# Altium PCB OK6410AV2.PcbDoc (part 3 of 4)
Units mm, origin at the board's own origin, x right, y up, seen from the top; angles counter-clockwise.
Board outline 144.31 x 105.28 mm, 4 copper layers (Top, GND, VCC, Bottom), stack 0.899 mm thick; 254 components, 278 nets, 1261 pads, 740 vias.
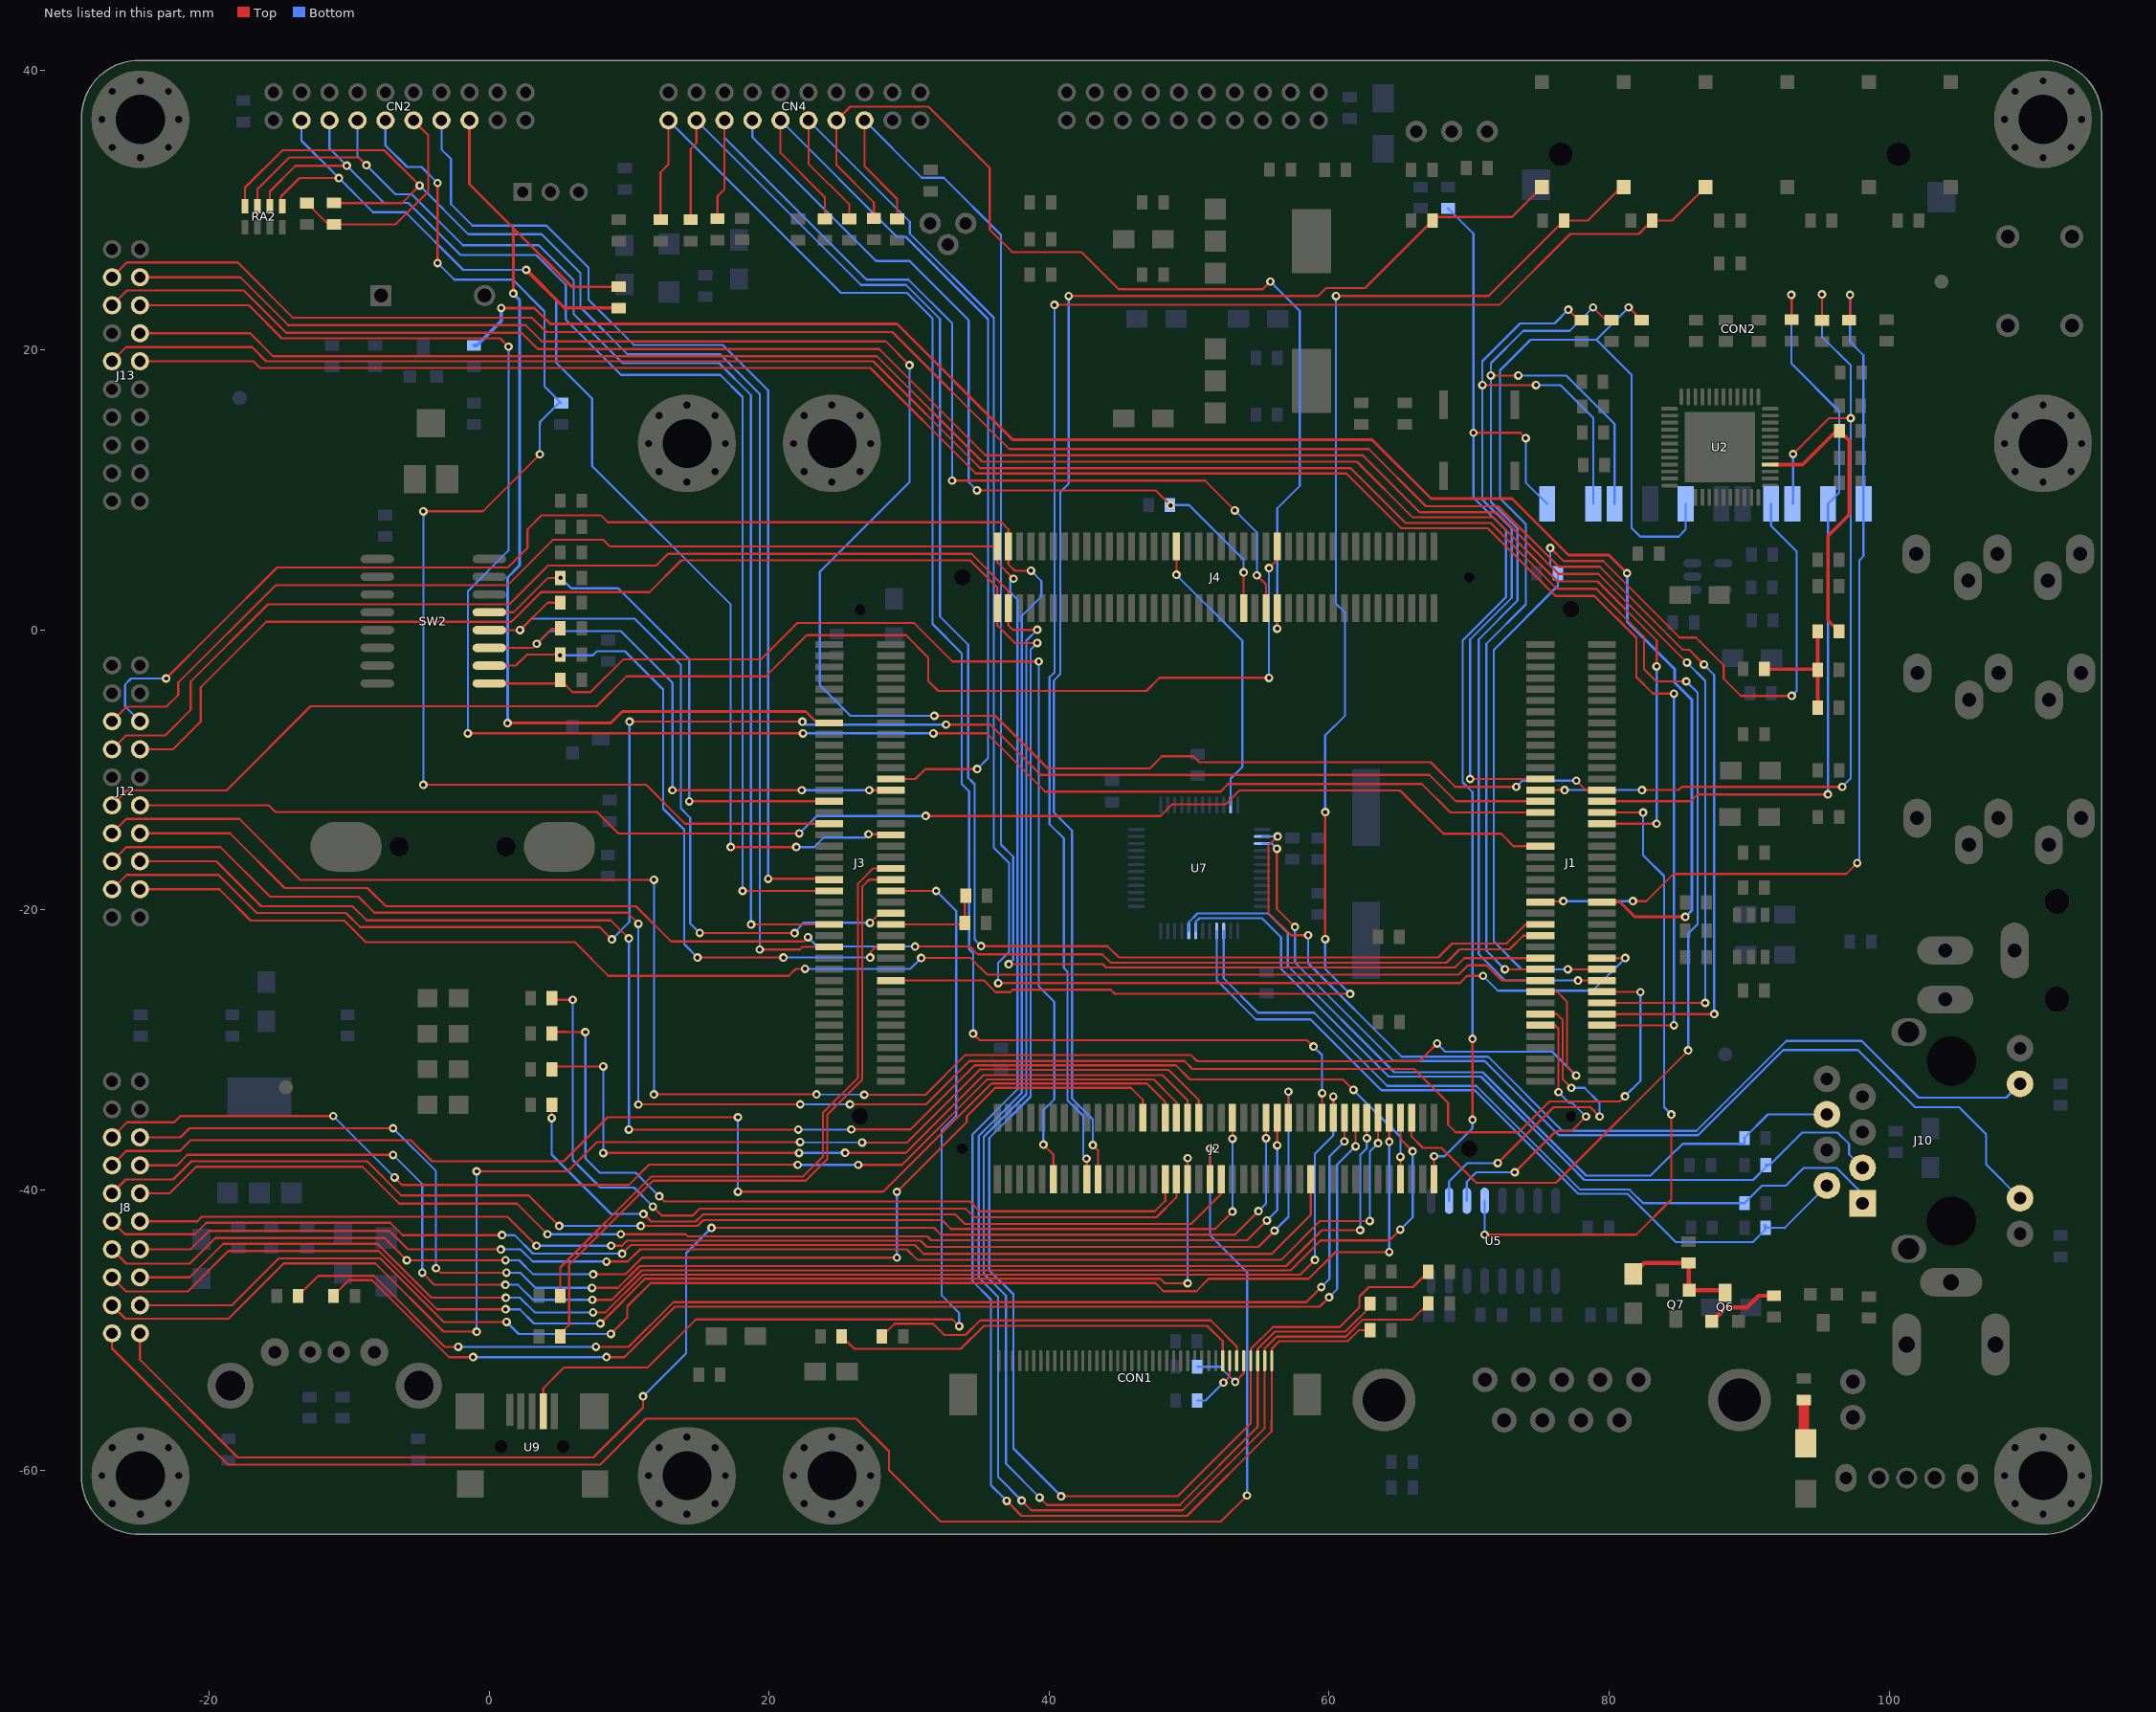
[diagram p5: the nets of this part, all layers, seen from the top]

## Via types
v1: diameter 0.61, hole 0.305, Top to Bottom, tented both sides, 719 vias
v2: diameter 1.27, hole 0.635, Top to Bottom, tented both sides, 21 vias

## Nets (pads, with @x,y where several pads share a name; then routed paths per layer and width w, separated by ;. In a path a pad name is that pad's centre, name@x,y a point inside that pad or via, vN(x,y) a via of type N, cw(c..) or ccw(c..) an arc to the next point about the centre after c; other vN are vias at no path point) (continued)
KEYINT4: J2.63 R74.2 S5.1 | length 113.7
  Top w0.152: v1(40.377,23.23) 72.157,23.23 77.229,28.302 82.122,28.302 R74.2@83.079,29.259 84.485,29.259 S5.1@86.875,31.649 ; v1(42.669,-37.756) 42.689,-37.772 J2.63@42.689,-39.231
  Bottom w0.152: v1(40.377,23.23) 40.377,-3.025 40.024,-3.378 40.024,-13.857 41.043,-14.876 41.043,-24.129 41.311,-24.397 41.311,-33.584 42.427,-34.7 42.427,-37.515 v1(42.669,-37.756)
KEYINT5: J3.20 R59.2 S6.1 | length 108.6
  Top w0.152: J3.20@28.689,-25.031 35.342,-25.031 36.168,-25.857 37.228,-25.857 37.392,-25.693 44.391,-25.693 44.687,-25.989 v1(61.493,-25.989) ; v1(59.715,-22.073) v1(59.715,-13.005) ; v1(60.484,23.864) 71.379,23.864 R59.2@76.775,29.259 78.483,29.259 80.872,31.649 S6.1@81.033,31.649
  Bottom w0.152: v1(59.715,-22.073) 59.715,-24.211 v1(61.493,-25.989) ; v1(59.715,-13.005) 59.715,-7.518 61.137,-6.097 61.137,1.246 60.484,1.899 v1(60.484,23.864)
KEYINT6: J2.61 R58.2 S7.1 | length 101.9
  Top w0.152: v1(41.388,23.864) 59.207,23.864 59.365,24.022 59.783,24.44 62.564,24.44 R58.2@67.382,29.258 67.637,29.514 73.055,29.514 S7.1@75.191,31.649 ; v1(43.116,-36.796) 43.489,-37.17 J2.61@43.489,-39.231
  Bottom w0.152: v1(41.388,23.864) 41.388,10.458 40.794,9.864 40.794,-3.142 40.329,-3.606 40.329,-13.027 41.632,-14.33 41.632,-33.474 43.116,-34.957 v1(43.116,-36.796)
KP_COL0: J2.41 J8.2 | length 119.6
  Top w0.152: J8.2@-26.95,-50.235 -26.95,-51.238 -26.95,-51.314 -18.641,-59.623 7.913,-59.623 11.199,-56.337 26.223,-56.337 28.549,-58.663 28.549,-60.014 32.222,-63.687 52.268,-63.687 v1(54.136,-61.82) ; v1(51.488,-37.041) 51.489,-37.043 J2.41@51.489,-39.231
  Bottom w0.152: v1(51.488,-37.041) 51.488,-43.223 54.136,-45.871 v1(54.136,-61.82)
KP_COL1: J2.44 J8.4 | length 98.3
  Top w0.152: J8.4@-26.95,-48.235 -25.989,-49.196 -18.639,-49.196 -14.686,-45.243 -8.135,-45.243 -3.26,-50.117 v1(-0.904,-50.117) ; v1(-0.905,-38.663) 5.6,-38.663 7.691,-36.572 v1(22.205,-36.572) ; v1(26.627,-36.605) 29.831,-36.605 35.045,-31.39 38.558,-31.39 38.578,-31.41 48.535,-31.41 50.689,-33.564 J2.44@50.689,-34.831
  Bottom w0.152: v1(-0.904,-50.117) -0.904,-41.495 ; -0.905,-41.494 v1(-0.905,-38.663) ; v1(22.205,-36.572) v1(26.627,-36.605)
KP_COL2: J2.45 J8.6 | length 92.5
  Top w0.152: J8.6@-26.95,-46.235 -25.94,-47.245 -21.536,-47.245 -18.641,-44.35 -7.899,-44.35 -3.731,-48.517 v1(1.166,-48.517) ; v1(7.943,-49.531) 11.13,-46.343 47.936,-46.343 48.254,-46.661 v1(49.888,-46.661) ; v1(49.888,-37.722) 49.889,-37.723 J2.45@49.889,-39.231
  Bottom w0.152: v1(1.166,-48.517) 2.179,-48.517 3.193,-49.531 v1(7.943,-49.531) ; v1(49.888,-46.661) v1(49.888,-37.722)
KP_COL3: J2.54 J8.8 | length 86
  Top w0.152: J8.8@-26.95,-44.235 -25.923,-45.263 -21.404,-45.263 -19.578,-43.437 -7.471,-43.437 v1(-5.89,-45.017) v1(1.161,-45.017) ; v1(7.424,-46.02) 9.726,-46.02 10.912,-44.834 v1(29.118,-44.834) ; v1(29.118,-40.131) 34.105,-35.144 34.105,-34.737 36.142,-32.701 45.831,-32.701 46.689,-33.559 J2.54@46.689,-34.831
  Bottom w0.152: v1(1.161,-45.017) 2.131,-45.017 3.134,-46.02 v1(7.424,-46.02) ; v1(29.118,-44.834) v1(29.118,-40.131)
KP_COL4: J2.23 J8.10 | length 91.5
  Top w0.152: J8.10@-26.95,-42.235 -26.034,-43.151 -21.026,-43.151 -20.211,-42.337 -7.08,-42.337 -6.198,-43.219 v1(0.909,-43.219) ; v1(9.492,-44.545) 10.114,-43.922 30.395,-43.922 31.037,-44.565 55.896,-44.565 58.689,-41.772 J2.23@58.689,-39.231
  Bottom w0.152: v1(0.909,-43.219) 1.801,-43.219 3.127,-44.545 v1(9.492,-44.545)
KP_COL5: J2.38 J8.12 | length 90.6
  Top w0.152: J8.12@-26.95,-40.235 -25.964,-39.249 -22.575,-39.249 -21.275,-37.949 -8.727,-37.949 -6.291,-40.386 2.816,-40.386 v1(4.991,-42.561) ; v1(10.818,-42.561) 14.879,-42.561 15.296,-42.144 32.343,-42.144 32.978,-42.779 51.855,-42.779 v1(53.089,-41.545) ; v1(53.089,-36.325) J2.38@53.089,-34.831
  Bottom w0.152: v1(4.991,-42.561) v1(10.818,-42.561) ; v1(53.089,-41.545) v1(53.089,-36.325)
KP_COL6: J2.50 J8.14 | length 88.1
  Top w0.152: J8.14@-26.95,-38.235 -25.923,-37.208 -22.102,-37.208 -21.345,-36.45 -5.589,-36.45 -4.095,-37.944 5.313,-37.944 8.456,-34.801 v1(17.757,-34.801) ; v1(17.757,-40.119) 28.145,-40.119 ; 28.145,-40.118 35.867,-32.396 46.984,-32.396 48.289,-33.701 J2.50@48.289,-34.831
  Bottom w0.152: v1(17.757,-40.119) v1(17.757,-34.801)
KP_COL7: J2.48 J8.16 | length 83.6
  Top w0.152: J8.16@-26.95,-36.235 -25.88,-35.165 -22.512,-35.165 -22.064,-34.717 v1(-11.148,-34.717) ; v1(-6.767,-39.097) -6.234,-39.63 9.969,-39.63 11.409,-38.191 14.16,-38.191 v1(22.029,-38.202) ; v1(26.36,-38.202) 29.475,-38.202 35.586,-32.091 47.459,-32.091 49.089,-33.722 J2.48@49.089,-34.831
  Bottom w0.152: v1@-11.147,-34.717 v1(-6.767,-39.097) ; v1(22.029,-38.202) v1(26.36,-38.202)
KP_ROW0: J2.32 J8.1 | length 103.9
  Top w0.152: J8.1@-24.95,-50.235 -24.95,-51.71 -24.95,-52.114 -17.957,-59.107 7.427,-59.107 10.986,-55.549 v1(10.986,-54.739) ; v1(15.875,-42.701) 31.774,-42.701 32.264,-43.191 53.265,-43.191 v1(54.946,-41.509) ; v1(55.489,-36.302) J2.32@55.489,-34.831
  Bottom w0.152: v1(10.986,-54.739) 14.062,-51.663 14.062,-44.514 v1(15.875,-42.701) ; v1(54.946,-41.509) 55.489,-40.967 v1(55.489,-36.302)
KP_ROW1: J2.10 J8.3 | length 105.8
  Top w0.152: J8.3@-24.95,-48.235 -18.398,-48.235 -15.047,-44.884 -7.798,-44.884 -6.291,-46.39 -6.29,-46.39 -3.256,-49.424 v1(1.239,-49.424) ; v1(8.687,-50.283) 9.865,-49.104 9.865,-48.309 11.526,-46.648 47.593,-46.648 48.165,-47.219 50.511,-47.219 51.387,-46.344 58.537,-46.344 60.448,-44.432 v1(64.29,-44.432) ; J2.10@64.289,-34.831 v1(64.29,-36.554)
  Bottom w0.152: v1(1.239,-49.424) 2.098,-50.283 v1(8.687,-50.283) ; v1(64.29,-44.432) v1(64.29,-36.554)
KP_ROW2: J2.20 J8.5 | length 102.2
  Top w0.152: J8.5@-24.95,-46.235 -21.404,-46.235 -19.002,-43.833 -7.984,-43.833 -4.122,-47.694 v1(1.179,-47.694) ; v1(7.414,-48.738) 8.303,-48.738 11.003,-46.038 57.941,-46.038 v1(58.98,-44.999) ; J2.20@60.289,-34.831 v1(60.289,-33.323)
  Bottom w0.152: v1(1.179,-47.694) 2.197,-47.694 3.241,-48.738 v1(7.414,-48.738) ; v1(58.98,-44.999) 58.98,-37.408 60.154,-36.234 60.154,-36.229 60.289,-36.093 v1(60.289,-33.323)
KP_ROW3: J2.12 J8.7 | length 98.8
  Top w0.152: J8.7@-24.95,-44.235 -21.328,-44.235 -21.328,-44.224 -20.019,-42.915 -7.135,-42.915 -5.813,-44.237 v1(0.823,-44.237) ; v1(8.369,-45.111) 9.896,-45.111 10.78,-44.227 29.814,-44.227 30.582,-44.994 56.557,-44.994 59.341,-42.21 v1(62.904,-42.21) ; v1(63.489,-36.655) J2.12@63.489,-34.831
  Bottom w0.152: v1(0.823,-44.237) 2.225,-44.237 3.099,-45.111 v1(8.369,-45.111) ; v1(62.904,-42.21) 62.904,-37.237 v1(63.489,-36.655)
KP_ROW4: J2.28 J8.9 | length 95.1
  Top w0.152: J8.9@-24.95,-42.235 -20.855,-42.235 -20.53,-41.91 1.305,-41.91 v1(3.371,-43.976) ; v1(8.699,-43.976) 9.479,-43.976 9.837,-43.618 30.806,-43.618 31.248,-44.06 54.94,-44.06 v1(56.098,-42.902) ; J2.28@57.089,-34.831 v1(57.089,-32.97)
  Bottom w0.152: v1(3.371,-43.976) v1(8.699,-43.976) ; v1(56.098,-42.902) 57.089,-41.911 v1(57.089,-32.97)
KP_ROW5: J2.30 J8.11 | length 91.7
  Top w0.152: J8.11@-24.95,-40.235 -22.83,-40.235 -20.936,-38.341 -9.065,-38.341 -6.434,-40.973 1.978,-40.973 v1(4.16,-43.155) ; v1(9.395,-43.155) 14.018,-43.155 14.176,-43.313 31.291,-43.313 31.571,-43.592 54.131,-43.592 v1(55.545,-42.177) ; v1(56.289,-36.815) J2.30@56.289,-34.831
  Bottom w0.152: v1(4.16,-43.155) v1(9.395,-43.155) ; v1(55.545,-42.177) 56.289,-41.434 v1(56.289,-36.815)
KP_ROW6: J2.8 J8.13 | length 109.1
  Top w0.152: J8.13@-24.95,-38.235 -22.311,-38.235 -21.567,-37.491 v1(-6.871,-37.491) ; v1(-4.788,-45.901) -3.917,-46.772 v1(1.156,-46.772) ; v1(7.363,-47.842) 8.768,-47.842 10.876,-45.733 57.255,-45.733 59.389,-43.6 64.309,-43.6 v1(65.078,-42.83) ; J2.8@65.089,-34.831 65.089,-36.361 v1(65.961,-37.232)
  Bottom w0.152: v1(-6.871,-37.491) -4.788,-39.574 v1(-4.788,-45.901) ; v1(1.156,-46.772) 2.05,-46.772 3.119,-47.842 v1(7.363,-47.842) ; v1(65.078,-42.83) 65.961,-41.947 v1(65.961,-37.232)
KP_ROW7: J2.14 J8.15 | length 106.2
  Top w0.152: J8.15@-24.95,-36.235 -22.064,-36.235 -21.415,-35.586 v1(-6.871,-35.586) ; v1(-3.805,-45.586) -3.49,-45.901 v1(1.227,-45.901) ; v1(7.341,-46.991) 9.187,-46.991 10.749,-45.429 56.93,-45.429 59.493,-42.866 v1(62.216,-42.866) ; v1(62.689,-36.299) J2.14@62.689,-34.831
  Bottom w0.152: v1(-6.871,-35.586) -3.805,-38.652 v1(-3.805,-45.586) ; v1(1.227,-45.901) 2.2,-45.901 3.289,-46.991 v1(7.341,-46.991) ; v1(62.216,-42.866) 62.216,-37.492 62.689,-37.019 v1(62.689,-36.299)
LED1: J10.10 U7.39 | length 74.9
  Top w0.152: v1(56.264,-15.615) 56.264,-19.917 v1(57.556,-21.209)
  Bottom w0.152: U7.39@55.214,-15.245 55.894,-15.245 v1(56.264,-15.615) ; v1(57.556,-21.209) 57.556,-23.749 64.592,-30.785 71.114,-30.785 76.412,-36.083 86.352,-36.083 92.438,-29.997 97.765,-29.997 101.854,-34.087 105.004,-34.087 106.934,-36.017 106.934,-38.171 J10.10@109.35,-40.587
LED2: J10.11 U7.38 | length 72.9
  Top w0.152: v1(56.317,-14.739) 55.651,-15.405 55.651,-20.193 57.259,-21.801 v1@58.496,-21.801
  Bottom w0.152: U7.38@55.214,-14.745 56.317,-14.745 v1(56.317,-14.739) ; v1(58.496,-21.793) 58.496,-23.8 65.176,-30.48 71.358,-30.48 76.654,-35.776 86.227,-35.776 92.659,-29.344 98.051,-29.344 102.108,-33.401 108.366,-33.401 J10.11@109.35,-32.417
LHSYNC: CON1.35 R65.1 | length 28.3
  Top w0.152: R65.1@28.05,-50.448 28.956,-49.542 31.699,-49.542 32.508,-50.35 34.03,-50.35 35.075,-49.306 51.534,-49.306 53.396,-51.167 CON1.35@53.396,-52.199
LVCLK: CON1.36 R66.1 | length 5
  Top w0.152: v1(53.282,-53.715) 53.907,-53.09 53.907,-52.21 CON1.36@53.896,-52.199
  Bottom w0.152: R66.1@50.561,-52.622 52.19,-52.622 v1(53.282,-53.715)
LVDEN: CON1.33 R4.1 | length 30.1
  Top w0.152: R4.1@25.182,-50.447 26.079,-51.345 33.685,-51.345 35.334,-49.697 51.29,-49.697 52.396,-50.803 CON1.33@52.396,-52.199
LVSYNC: CON1.34 R64.1 | length 4.2
  Top w0.152: v1(52.446,-53.753) 52.896,-53.304 CON1.34@52.896,-52.199
  Bottom w0.152: R64.1@50.561,-55.04 51.16,-55.04 v1(52.446,-53.753)
MIC: C35.2 R70.1 R71.1 R73.1 | length 9.3
  Top w0.254: C35.2@91.09,-2.783 94.844,-2.783 R71.1@94.895,-2.834 ; R70.1@94.895,-5.549 R71.1@94.895,-2.834 ; R73.1@94.895,-0.093 R71.1@94.895,-2.834
MICBIAS: C42.1 R73.2 U2.28 | length 21.5
  Top w0.254: U2.28@91.51,11.821 93.829,11.821 94.869,12.86 96.239,14.23 C42.1@96.457,14.23 97.155,13.532 97.155,8.255 95.631,6.731 95.631,0.695 R73.2@96.419,-0.093
MMC0_CDN: CON2.11 J1.59 R51.1 | length 75.6
  Top w0.152: v1(75.794,5.867) 76.733,4.928 79.578,4.928 85.039,-0.533 86.208,-0.533 88.189,-2.515 88.189,-3.48 89.408,-4.699 v1(93.04,-4.699) ; v1(77.051,-24.232) J1.59@79.488,-24.231
  Bottom w0.152: v1(75.794,5.867) 75.794,4.616 R51.1@76.335,4.075 ; R51.1@76.342,4.075 76.342,3.167 71.767,-1.408 71.767,-22.258 73.741,-24.232 v1(77.051,-24.232) ; CON2.11@91.567,9.017 91.567,7.442 93.396,5.613 93.396,-4.343 v1(93.04,-4.699)
MMC0_CLK: CON2.5 J1.60 R50.1 | length 81.2
  Top w0.152: v1(72.548,-24.231) J1.60@75.088,-24.231 ; v1(81.393,23.049) 82.383,22.059 82.467,22.143 82.458,22.152 R50.1@82.314,22.152
  Bottom w0.152: v1(72.548,-24.231) 71.225,-22.908 71.225,-0.975 74.045,1.845 74.045,7.567 72.202,9.411 72.202,18.555 74.396,20.749 79.094,20.749 ; v1(81.393,23.049) 79.094,20.749 ; CON2.5@85.471,9.017 85.471,7.188 84.963,6.68 82.22,6.68 81.61,7.29 81.61,18.233 79.094,20.749
MMC0_CMD: CON2.2 J1.28 R93.1 | length 68.5
  Top w0.152: J1.28@75.088,-11.431 J1.28@75.088,-11.431 v1(76.817,-11.43) ; v1(82.352,-11.43) 84.954,-11.43 85.185,-11.199 v1(96.647,-11.199) ; v1(93.142,12.573) 95.707,15.138 v1(97.257,15.138) ; R93.1@95.199,22.123 v1(95.199,23.978)
  Bottom w0.152: v1(76.817,-11.43) v1(82.352,-11.43) ; CON2.2@93.091,9.017 93.142,9.068 v1(93.142,12.573) ; v1(95.199,23.978) 95.199,20.963 97.257,18.905 97.257,-10.589 v1(96.647,-11.199)
MMC0_DATA0: CON2.7 J1.61 R92.1 | length 80.4
  Top w0.152: v1(71.552,18.186) v1(73.508,18.186) ; v1(77.775,-25.032) J1.61@79.375,-25.032 ; v1(78.853,23.049) 79.783,22.119 79.816,22.152 R92.1@80.168,22.152 ; J1.61@79.375,-25.031 J1.61@79.488,-25.031
  Bottom w0.152: v1(73.508,18.186) 76.937,18.186 80.391,14.732 CON2.7@80.391,9.017 ; v1(77.775,-25.032) 72.569,-25.032 70.676,-23.138 70.676,-0.666 73.456,2.114 73.456,7.245 71.552,9.149 71.552,19.07 73.853,21.372 77.176,21.372 v1(78.853,23.049)
MMC0_DATA1: CON2.8 J1.26 R91.1 | length 61
  Top w0.152: v1(70.066,-10.635) 74.807,-10.635 J1.26@75.088,-10.631 ; v1(70.942,17.501) v1(74.778,17.501) ; v1(77.083,22.889) 77.903,22.068 77.986,22.151 R91.1@78.03,22.151
  Bottom w0.152: v1(70.066,-10.635) 70.066,-0.673 73.037,2.298 73.037,7.232 70.942,9.327 70.942,19.212 73.64,21.91 76.104,21.91 v1(77.083,22.889) ; v1(74.778,17.501) 76.53,17.501 78.867,15.164 CON2.8@78.867,9.017
MMC0_DATA2: CON2.9 J1.48 R95.1 | length 66.9
  Top w0.152: J1.48@75.088,-19.431 v1(76.721,-19.362) ; v1(81.692,-19.362) 82.655,-19.362 84.603,-17.414 96.942,-17.414 v1(97.719,-16.637) ; v1(97.206,23.952) 97.206,22.216 R95.1@97.141,22.151 R95.1@97.268,22.024
  Bottom w0.152: v1(76.721,-19.362) v1(81.692,-19.362) ; v1(97.206,23.952) 97.206,20.599 98.171,19.634 CON2.9@98.171,9.017 98.171,5.278 97.866,4.973 97.866,-16.49 v1(97.719,-16.637)
MMC0_DATA3: CON2.1 J1.29 R94.1 | length 55.6
  Top w0.152: J1.29@79.488,-12.231 85.816,-12.231 86.297,-11.75 v1@95.631,-11.75 ; v1(93.015,23.952) 93.04,23.927 R94.1@93.04,22.174
  Bottom w0.152: v1(93.015,23.952) 93.015,19.05 96.444,15.621 96.444,9.83 CON2.1@95.631,9.017 v1(95.631,-11.735)
MMC0_WPN: CON2.10 J2.1 R19.1 | length 83.5
  Top w0.152: J2.1@67.489,-39.231 v1(67.489,-37.584) ; v1(70.238,-29.207) 70.238,-30.561 70.24,-30.564 v1(70.24,-34.978) ; v1(70.307,14.097) 73.66,14.097 v1(74.041,13.716)
  Bottom w0.152: v1(67.489,-37.584) 68.244,-37.584 70.241,-35.587 ; R19.1@68.495,30.123 70.306,28.312 70.306,9.462 72.637,7.131 72.637,2.358 69.533,-0.747 69.533,-10.869 70.238,-11.58 v1(70.238,-29.207) ; 70.24,-35.587 v1(70.24,-34.978) ; v1(74.041,13.716) 74.041,10.541 CON2.10@75.565,9.017
MMC1_CDN: CN4.9 J3.56 R30.1 | length 68
  Top w0.152: CN4.9@20.804,36.412 20.804,34.088 23.974,30.918 R30.1@23.974,29.375 ; J3.56@28.689,-10.631 30.442,-10.631 31.146,-9.927 v1(34.857,-9.927)
  Bottom w0.152: CN4.9@20.804,36.412 29.127,28.09 29.75,28.09 35.63,22.21 35.63,-9.154 v1(34.857,-9.927)
MMC1_CLK: CN4.7 J4.46 R31.1 | length 60.4
  Top w0.152: v1(34.83,9.981) 47.603,9.981 v1(48.671,8.913) ; J4.46@53.89,1.569 v1(53.89,4.119)
  Bottom w0.152: CN4.7@18.804,36.412 18.804,35.198 27.637,26.365 30.022,26.365 34.238,22.149 34.238,10.573 v1(34.83,9.981) ; R31.1@48.626,8.932 49.987,8.932 50.006,8.913 ; v1(48.671,8.913) 50.006,8.913 ; v1(53.89,4.119) 53.89,5.029 50.006,8.913
MMC1_CMD: CN4.11 J1.57 R18.1 | length 124.2
  Top w0.152: CN4.11@22.804,36.412 22.804,33.312 25.727,30.39 R18.1@25.727,29.377 ; v1(36.354,-25.219) 69.327,-25.219 69.844,-24.701 v1(70.992,-24.701) ; J1.57@79.488,-23.431 79.489,-23.43 v1(81.157,-23.43)
  Bottom w0.152: CN4.11@22.804,36.412 30.046,29.171 30.046,28.322 36.047,22.321 36.047,-15.537 37.126,-16.616 37.126,-23.005 36.354,-23.776 v1(36.354,-25.219) ; v1(70.992,-24.701) 72.055,-25.764 78.823,-25.764 v1(81.157,-23.43)
MMC1_DATA0: CN4.5 J4.50 R24.1 | length 70.4
  Top w0.152: R24.1@16.298,29.385 16.298,30.991 16.804,31.497 CN4.5@16.804,36.412 ; v1(33.061,10.675) 51.134,10.675 v1(53.254,8.554) ; v1(54.832,3.908) 55.49,3.251 J4.50@55.49,1.569
  Bottom w0.152: CN4.5@16.804,36.412 16.804,35.18 26.953,25.032 29.947,25.032 33.061,21.917 v1(33.061,10.675) ; v1(53.254,8.554) 54.832,6.977 v1(54.832,3.908)
MMC1_DATA1: CN4.3 J1.52 R23.1 | length 117.8
  Top w0.152: R23.1@14.386,29.291 R23.1@14.386,29.318 14.386,34.367 14.804,34.786 CN4.3@14.804,36.412 ; v1(35.135,-22.574) 44.168,-22.574 44.98,-23.386 67.792,-23.386 68.782,-22.396 72.662,-22.396 74.026,-21.031 J1.52@75.088,-21.031
  Bottom w0.152: CN4.3@14.804,36.412 26.557,24.66 29.766,24.66 32.198,22.228 32.198,0.975 34.211,-1.038 34.211,-10.553 34.468,-10.809 34.501,-10.843 34.672,-11.013 ; 34.673,-11.013 34.673,-22.112 v1(35.135,-22.574)
MMC1_DATA2: CN4.15 J1.58 R22.1 | length 112.1
  Top w0.152: CN4.15@26.804,36.412 26.804,33.128 29.14,30.792 R22.1@29.14,29.377 ; v1(37.114,-23.864) 43.832,-23.864 44.074,-24.105 68.982,-24.105 69.656,-23.431 J1.58@75.088,-23.431
  Bottom w0.152: CN4.15@26.804,36.412 30.904,32.313 32.464,32.313 36.552,28.224 36.552,-15.318 37.43,-16.196 37.43,-23.547 v1(37.114,-23.864)
MMC1_DATA3: CN4.13 J4.52 R20.1 | length 75.5
  Top w0.152: R20.1@27.482,29.41 27.482,30.542 24.804,33.219 CN4.13@24.804,36.412 25.785,37.393 31.372,37.393 35.747,33.018 35.747,28.612 37.352,27.007 42.294,27.007 44.956,24.345 55.245,24.345 v1(55.798,24.898) ; v1(56.289,0.101) J4.52@56.29,1.569
  Bottom w0.152: v1(55.798,24.898) 57.9,22.796 57.9,10.301 56.289,8.691 v1(56.289,0.101)
MMC1_WPN: CN4.1 J2.22 R29.1 | length 114.4
  Top w0.152: R29.1@12.239,29.319 12.239,32.696 12.804,33.261 CN4.1@12.804,36.412 ; v1(34.565,-28.83) 35.026,-29.29 58.419,-29.29 v1(58.879,-29.751) ; J2.22@59.489,-34.831 v1(59.49,-33.089)
  Bottom w0.152: CN4.1@12.804,36.412 25.122,24.094 29.839,24.094 31.661,22.272 31.661,0.434 33.752,-1.657 33.752,-10.999 34.279,-11.526 34.279,-22.81 34.296,-22.81 34.565,-23.079 v1(34.565,-28.83) ; v1(58.879,-29.751) 59.49,-30.362 v1(59.49,-33.089)
N3564506: LED6.1 R76.2 | length 3
  Top w0.762: LED6.1@93.904,-58.031 R76.2@93.904,-54.991
N4859037: CN2.11 R13.2 R72.2 | length 16.1
  Top w0.152: R72.2@-13.028,30.502 -11.458,28.932 -10.932,28.932 R13.2@-10.985,28.985 ; R13.2@-11.106,28.985 R13.2@-10.985,28.985 ; CN2.11@-5.413,36.412 -4.355,35.355 -4.355,31.324 -6.695,28.985 R13.2@-10.985,28.985
NLED1: J2.47 R80.1 | length 60
  Top w0.152: R80.1@4.478,-26.43 4.497,-26.411 v1(5.962,-26.411) ; v1(11.686,-41.179) 12.327,-41.819 14.54,-41.819 15.023,-41.337 34.042,-41.337 34.656,-41.951 47.665,-41.951 49.089,-40.526 J2.47@49.089,-39.231
  Bottom w0.152: 5.961,-30.002 5.961,-37.843 7.948,-39.83 10.337,-39.83 v1(11.686,-41.179) ; 5.962,-30.002 v1(5.962,-26.411)
NLED2: J2.49 R55.1 | length 56.2
  Top w0.152: R55.1@4.478,-28.704 5.522,-28.704 5.535,-28.717 v1(6.861,-28.717) ; v1(12.136,-40.445) 12.504,-40.813 34.342,-40.813 35.038,-41.509 47.545,-41.509 48.289,-40.765 J2.49@48.289,-39.231
  Bottom w0.152: v1(6.861,-28.717) 6.861,-31.495 6.86,-31.496 6.86,-37.735 7.889,-38.765 10.456,-38.765 v1(12.136,-40.445)
NLED3: J2.46 R57.1 | length 55.9
  Top w0.152: R57.1@4.478,-31.195 4.498,-31.175 v1(8.146,-31.175) ; v1(8.146,-37.354) v1(22.128,-37.354) ; v1(25.415,-37.344) 29.752,-37.344 35.309,-31.786 48.092,-31.786 49.889,-33.584 J2.46@49.889,-34.831
  Bottom w0.152: v1(8.146,-37.354) v1(8.146,-31.175) ; v1(22.128,-37.354) v1(25.415,-37.344)
NLED4: J2.39 R82.1 | length 56.2
  Top w0.152: v1(4.458,-34.861) 4.458,-33.934 4.478,-33.934 4.649,-33.934 4.551,-33.837 4.538,-33.824 R82.1@4.478,-33.824 ; v1(11.013,-41.707) 11.562,-42.256 14.752,-42.256 15.27,-41.738 33.286,-41.738 33.964,-42.416 50.148,-42.416 52.289,-40.275 J2.39@52.289,-39.231
  Bottom w0.152: v1(4.458,-34.861) 4.458,-37.469 8.697,-41.707 v1(11.013,-41.707)
NRESET: CN2.15 J3.65 R3.1 | length 77.8
  Top w0.203: CN2.15@-1.413,36.412 -1.413,31.846 1.718,28.715 ; v1(1.306,-6.65) 3.85,-6.65 ; v1(1.718,24.045) 1.718,28.715 ; 3.851,-6.65 8.664,-6.65 9.505,-5.81 22.601,-5.81 23.422,-6.631 J3.65@24.289,-6.631 ; R3.1@9.255,24.532 9.081,24.532 9.068,24.52 5.913,24.52 1.718,28.715
  Bottom w0.203: v1(1.306,-6.65) 1.306,3.755 2.158,4.608 2.158,23.605 v1(1.718,24.045)
OEN: J4.33 U7.35 | length 20.8
  Top w0.152: v1(49.09,3.948) 49.09,4.611 J4.33@49.09,5.969
  Bottom w0.152: v1(49.09,3.948) 53.793,-0.755 53.793,-9.773 52.964,-10.602 U7.35@52.964,-12.495
OM0: J3.30 R12.2 R53.1 | length 7.9
  Top w0.152: J3.30@28.689,-21.031 34.116,-21.031 34.116,-20.76 R12.2@33.973,-20.903 ; R12.2@33.973,-20.926 R12.2@33.973,-20.903 ; R53.1@34.042,-18.965 33.973,-19.034 R12.2@33.973,-20.903
OM1: J3.51 R7.1 SW2.5 | length 37.9
  Top w0.152: SW2.5@0,1.27 1.734,1.27 4.194,3.73 R7.1@5.078,3.73 R7.1@5.104,3.73 ; v1(14.286,-12.231) 21.56,-12.231 J3.51@24.289,-12.231
  Bottom w0.152: v1(5.101,3.746) 5.86,2.987 9.216,2.987 14.286,-2.083 v1(14.286,-12.231)
OM2: J3.32 R8.1 SW2.4 | length 53.1
  Top w0.152: SW2.4@0,0 v1(2.2,0) 4.162,1.962 R8.1@5.078,1.962 ; v1(15.035,-21.636) 21.797,-21.636 v1(21.808,-21.647) ; v1(27.2,-20.911) 27.785,-20.326 28.616,-20.326 28.616,-20.304 J3.32@28.689,-20.231
  Bottom w0.152: v1(2.2,0) 2.998,0.798 2.998,0.813 10.379,0.813 13.681,-2.489 13.681,-12.739 14.359,-13.417 14.359,-20.961 v1(15.035,-21.636) ; v1(21.808,-21.647) 22.433,-20.911 v1(27.2,-20.911)
OM3: J3.54 R9.1 SW2.3 | length 40.6
  Top w0.152: SW2.3@0,-1.27 3.101,-1.27 v1(3.394,-0.977) 4.471,0.1 5.078,0.1 5.094,0.1 5.099,0.105 R9.1@5.121,0.127 ; v1(13.084,-11.44) v1(22.331,-11.44) ; v1(27.151,-11.44) 28.446,-11.431 J3.54@28.689,-11.431
  Bottom w0.152: v1(3.394,-0.977) 4.305,-0.065 9.388,-0.065 13.084,-3.762 v1(13.084,-11.44) ; v1(22.331,-11.44) v1(27.151,-11.44)
OM4: J3.26 R10.1 SW2.2 | length 48.6
  Top w0.152: SW2.2@0,-2.54 1.895,-2.54 2.679,-1.757 R10.1@5.078,-1.757 R10.1@5.078,-1.75 ; v1(14.875,-23.391) v1(21.015,-23.391) ; v1(27.214,-23.388) 27.214,-23.021 27.603,-22.631 J3.26@28.689,-22.631
  Bottom w0.152: v1(5.042,-1.791) 5.111,-1.791 5.126,-1.806 7.392,-1.806 7.684,-1.514 9.693,-1.514 12.421,-4.242 12.421,-12.754 13.922,-14.255 13.922,-22.426 v1(14.875,-23.391) ; v1(21.015,-23.391) v1(27.214,-23.388)
OTGDM: J3.40 R26.1 | length 47.4
  Top w0.152: R26.1@5.075,-47.57 5.075,-45.539 11.584,-39.03 22.428,-39.03 23.838,-37.621 23.838,-34.476 26.343,-31.972 26.343,-18.106 27.417,-17.031 J3.40@28.689,-17.031
OTGDP: J3.38 R25.1 | length 49.7
  Top w0.152: R25.1@5.075,-50.448 5.075,-50.249 5.712,-49.613 5.712,-45.335 11.712,-39.335 22.606,-39.335 24.143,-37.798 24.143,-34.603 26.649,-32.097 26.649,-18.306 27.124,-17.831 J3.38@28.689,-17.831
OTGID: J3.36 U9.4 | length 69.5
  Top w0.152: U9.4@3.856,-55.809 3.856,-54.155 5.328,-52.684 11.314,-52.684 14.763,-49.235 33.08,-49.235 v1(33.569,-49.724) ; J3.36@28.689,-18.631 v1(31.923,-18.632)
  Bottom w0.152: v1(31.923,-18.632) 33.353,-20.062 33.353,-34.68 32.323,-35.71 32.323,-47.528 33.569,-48.774 v1(33.569,-49.724)
PWM_TOUT1: J1.47 R1.2 | length 124.9
  Top w0.203: v1(0.854,23.007) 3.234,23.007 4.367,21.874 29.129,21.874 37.397,13.606 63.065,13.606 67.277,9.395 73.054,9.395 77.089,5.359 79.985,5.359 v1(81.28,4.064) ; J1.47@79.488,-19.431 80.788,-19.431 81.845,-20.488 v1(85.439,-20.488)
  Bottom w0.203: v1(81.28,4.064) 81.28,0.61 84.689,-2.799 84.689,-3.756 85.909,-4.976 85.909,-20.018 v1(85.439,-20.488)
  Bottom w0.254: R1.2@-1.098,20.329 -0.891,20.329 0.854,22.074 v1(0.854,23.007)
R81-2: Q6.B R81.2 | length 5.2
  Top w0.305: Q6.B@87.325,-49.378 88.316,-48.387 89.84,-48.387 90.678,-47.549 R81.2@91.77,-47.549
R97-1: C31.2 Q6.C Q7.B R97.1 | length 8.9
  Top w0.305: C31.2@81.718,-46.003 82.509,-45.212 R97.1@85.674,-45.212 85.674,-47.13 Q7.B@85.712,-47.168 88.1,-47.168 Q6.C@88.278,-47.346
RTCK: J3.25 R13.1 RA2.4 | length 99.7
  Top w0.152: RA2.4@-17.451,30.29 -17.451,31.609 -14.774,34.286 -7.504,34.286 v1(-4.977,31.758) -6.226,30.509 -10.759,30.509 -10.759,30.659 -11.196,30.659 -11.106,30.569 R13.1@-11.106,30.509 ; v1(19.322,-22.82) 22.173,-22.82 22.362,-22.631 J3.25@24.289,-22.631
  Bottom w0.152: v1(-4.977,31.758) -1.498,28.28 3.739,28.28 6.508,25.511 6.508,23.075 9.879,19.704 16.485,19.704 19.322,16.868 v1(19.322,-22.82)
RTSN0: J1.68 U5.10 | length 24.9
  Top w0.152: v1(72.036,-38.08) 76.026,-34.089 78.658,-34.089 v1(79.316,-34.747) ; J1.68@75.088,-27.431 76.262,-27.431 76.683,-27.852 76.683,-32.086 v1(77.296,-32.7)
  Bottom w0.152: U5.10@68.562,-40.767 68.562,-39.383 69.866,-38.08 v1(72.036,-38.08) ; v1(77.296,-32.7) 78.236,-32.7 79.316,-33.779 v1(79.316,-34.747)
RTSN1: J1.33 J13.13 | length 134.4
  Top w0.152: J13.13@-24.95,21.205 -17.08,21.205 -15.444,19.568 27.684,19.568 35.22,12.032 61.978,12.032 65.956,8.054 71.727,8.054 76.302,3.48 79.172,3.48 83.394,-0.742 v1@83.394,-2.591 ; J1.33@79.488,-13.831 v1(83.394,-13.832)
  Bottom w0.152: v1(83.394,-13.832) v1@83.394,-2.591
  other v1: 83.388,-2.591
RXD0: J1.31 U5.12 | length 48.2
  Top w0.152: v1(71.102,-43.193) 81.924,-43.193 84.439,-40.678 v1(84.439,-34.6) ; J1.31@79.488,-13.031 v1(82.422,-13.031)
  Bottom w0.152: v1(71.102,-43.193) U5.12@71.102,-40.767 ; v1(82.422,-13.031) 82.422,-16.078 83.922,-17.578 83.922,-34.083 v1(84.439,-34.6)
RXD1: J2.6 J13.12 | length 177.5
  Top w0.152: J13.12@-26.95,19.205 -25.948,20.206 -16.945,20.206 -15.944,19.206 27.432,19.206 35.068,11.57 61.541,11.57 65.468,7.643 71.554,7.643 76.251,2.946 79.07,2.946 82.483,-0.467 82.483,-2.778 83.368,-3.663 v1(85.504,-3.663) ; J2.6@65.889,-34.831 65.889,-36.18 66.697,-36.988 68.012,-36.988 70.505,-39.481 76.197,-39.481 v1(85.65,-30.028)
  Bottom w0.152: v1(85.504,-3.663) 86.315,-4.473 86.315,-21.009 85.65,-21.674 v1(85.65,-30.028)
RXD2: J1.32 J13.15 | length 135.8
  Top w0.152: J13.15@-24.95,23.205 -17.17,23.205 -14.816,20.851 0.771,20.851 v1(1.373,20.249) ; v1(-1.531,-7.374) v1(22.412,-7.374) ; v1(31.725,-7.374) 35.547,-7.374 39.706,-11.533 52.243,-11.533 52.778,-10.998 66.624,-10.998 68.657,-13.031 J1.32@75.088,-13.031
  Bottom w0.152: v1(-1.531,-7.374) -1.531,-5.58 -1.531,-2.955 ; -1.53,-2.954 -1.53,2.779 1.373,5.682 v1(1.373,20.249) ; v1(22.412,-7.374) v1(31.725,-7.374)
RXD3: J1.27 J13.17 | length 143.1
  Top w0.152: J13.17@-24.95,25.205 -17.786,25.205 -14.367,21.786 2.587,21.786 3.751,20.622 28.324,20.622 v1(30.023,18.923) ; v1(31.796,-6.122) 36.149,-6.122 39.902,-9.877 47.196,-9.877 48.062,-9.011 50.3,-9.011 50.722,-9.433 67.244,-9.433 69.009,-11.198 v1(73.365,-11.198) ; v1(77.655,-10.756) 78.33,-11.431 J1.27@79.488,-11.431
  Bottom w0.152: v1(30.023,18.923) 30.023,10.57 24.869,5.415 23.619,4.165 23.618,-3.941 25.8,-6.122 v1(31.796,-6.122) ; v1(73.365,-11.198) 73.807,-10.756 v1(77.655,-10.756)
RXD+: J10.1 R43.2 U7.3 | length 58.2
  Bottom w0.152: U7.3@52.464,-21.495 52.464,-24.88 54.915,-27.33 58.928,-27.33 64.153,-32.555 70.519,-32.555 77.934,-39.97 81.451,-39.97 82.42,-40.94 R43.2@89.668,-40.94 90.916,-39.691 92.624,-39.691 93.874,-38.442 93.874,-38.417 96.251,-38.417 98.1,-40.267 J10.1@98.1,-40.947
RXD-: J10.2 R44.2 U7.4 | length 57
  Bottom w0.152: U7.4@51.964,-21.495 51.964,-25.015 54.762,-27.813 58.674,-27.813 63.723,-32.862 70.393,-32.862 77.807,-40.277 81.324,-40.277 84.777,-43.73 90.247,-43.73 91.127,-42.85 91.127,-42.503 91.184,-42.561 R44.2@91.184,-42.705 92.504,-42.705 92.518,-42.719 J10.2@95.56,-39.677
SELNAND: J2.69 R11.1 SW2.1 | length 81.1
  Top w0.152: SW2.1@0,-3.81 5.22,-3.81 R11.1@5.22,-3.702 ; R11.1@5.078,-3.56 R11.1@5.22,-3.702 ; v1(39.254,-2.241) 33.084,-2.241 30.343,0.5 21.997,0.5 19.399,-2.098 9.566,-2.098 7.232,-4.432 5.95,-4.432 R11.1@5.22,-3.702 ; v1(39.584,-36.756) 40.289,-37.462 J2.69@40.289,-39.231
  Bottom w0.152: v1(39.254,-2.241) 39.254,-25.447 40.362,-26.556 40.362,-33.515 39.584,-34.294 v1(39.584,-36.756)
SPICLK0: J2.7 J12.5 | length 113
  Top w0.152: J12.5@-24.95,-16.517 -19.498,-16.517 -16.283,-19.731 -9.771,-19.731 -8.761,-20.742 8.686,-20.742 v1(9.972,-22.028) ; v1(9.972,-35.68) v1(22.078,-35.68) ; v1(25.857,-35.67) 30.087,-35.67 34.672,-31.085 49.04,-31.085 50.049,-32.095 60.984,-32.095 v1(61.736,-32.847) ; v1(65.087,-37.631) 65.087,-38.24 65.089,-38.242 J2.7@65.089,-39.231
  Bottom w0.152: v1(9.972,-35.68) v1(9.972,-22.028) ; v1(22.078,-35.68) v1(25.857,-35.67) ; v1(61.736,-32.847) 65.087,-36.198 v1(65.087,-37.631)
SPICLK1: J4.51 J12.10 | length 100.5
  Top w0.152: J12.10@-26.95,-12.517 -25.887,-11.454 -18.771,-11.454 -12.762,-5.446 7.664,-5.446 9.81,-3.299 19.754,-3.299 22.682,-0.371 29.761,-0.371 31.364,-1.974 31.364,-3.635 32.071,-4.342 46.945,-4.342 47.877,-3.409 v1(55.701,-3.409) ; v1(55.701,4.429) 56.346,5.074 56.346,5.969 56.346,6.044 56.289,5.988 J4.51@56.29,5.969
  Bottom w0.152: v1(55.701,-3.409) v1(55.701,4.429)
SPICS0: J1.30 J12.4 | length 121.6
  Top w0.152: J12.4@-26.95,-18.517 -25.919,-17.487 -19.33,-17.487 -16.611,-20.206 -10.246,-20.206 -9.237,-21.214 7.881,-21.214 v1(8.763,-22.096) ; v1(10.019,-6.538) v1(22.367,-6.538) ; v1(32.627,-6.755) 35.797,-6.755 39.394,-10.351 67.171,-10.351 69.051,-12.231 J1.30@75.088,-12.231
  Bottom w0.152: v1(8.763,-22.096) 10.019,-20.84 v1(10.019,-6.538) ; v1(22.367,-6.538) 22.548,-6.755 v1(32.627,-6.755)
SPICS1: J1.54 J12.7 | length 104.9
  Top w0.152: J12.7@-24.95,-14.517 -18.522,-14.517 -14.617,-18.423 -8.696,-18.423 -7.393,-19.726 10.478,-19.726 12.993,-22.241 22.469,-22.241 v1(22.766,-21.944) ; v1(30.419,-22.602) 34.328,-22.602 34.889,-23.163 43.787,-23.163 44.391,-23.767 68.372,-23.767 69.331,-22.808 72.886,-22.808 73.863,-21.831 J1.54@75.088,-21.831
  Bottom w0.152: v1(22.766,-21.944) 23.424,-22.602 v1(30.419,-22.602)
SPIMISO0: J1.63 J12.6 | length 139.7
  Top w0.152: J12.6@-26.95,-16.517 -25.933,-15.5 -19.204,-15.5 -15.662,-19.042 -9.352,-19.042 -8.201,-20.193 9.867,-20.193 v1(10.653,-20.979) ; v1(10.653,-33.897) 10.673,-33.877 v1(22.212,-33.877) ; v1(25.761,-33.877) 31.207,-33.877 34.304,-30.78 49.663,-30.78 50.23,-31.348 66.072,-31.348 68.501,-33.777 68.501,-35.331 69.049,-35.88 73.532,-35.88 75.742,-33.67 80.763,-33.67 v1(81.132,-33.302) ; J1.63@79.488,-25.831 80.244,-25.831 v1(82.235,-25.863)
  Bottom w0.152: v1(10.653,-33.897) v1(10.653,-20.979) ; v1(22.212,-33.877) v1(25.761,-33.877) ; v1(81.132,-33.302) 82.235,-32.199 v1(82.235,-25.863)
SPIMISO1: J1.64 J12.8 | length 132.7
  Top w0.152: J12.8@-26.95,-14.517 -25.929,-13.496 -17.842,-13.496 -13.495,-17.843 v1(11.768,-17.843) ; v1(11.768,-33.168) v1(23.378,-33.168) ; v1(26.792,-33.193) 31.162,-33.193 34.006,-30.349 50.108,-30.349 50.563,-30.804 66.437,-30.804 v1(67.71,-29.53) ; J1.64@75.088,-25.831 76.279,-25.831 76.987,-26.54 76.987,-31.169 v1(77.643,-31.824)
  Bottom w0.152: v1(11.768,-33.168) v1(11.768,-17.843) ; v1(23.378,-33.168) v1(26.792,-33.193) ; v1(67.71,-29.53) 68.295,-30.114 75.933,-30.114 v1(77.643,-31.824)
SPIMOSI0: J1.62 J12.3 | length 104.3
  Top w0.152: J12.3@-24.95,-18.517 -19.283,-18.517 -17.048,-20.752 -10.355,-20.752 -8.816,-22.291 6.11,-22.291 8.516,-24.696 21.394,-24.696 21.891,-24.199 v1(22.554,-24.199) ; v1(30.848,-23.427) 34.386,-23.427 35.578,-24.618 69.245,-24.618 69.916,-23.947 71.249,-23.947 72.333,-25.031 J1.62@75.088,-25.031
  Bottom w0.152: v1(22.554,-24.199) 30.077,-24.199 v1(30.848,-23.427)
SPIMOSI1: J1.38 J12.9 | length 103.8
  Top w0.152: J12.9@-24.95,-12.517 -15.754,-12.517 -15.28,-12.991 7.689,-12.991 9.228,-14.529 v1(22.146,-14.529) ; v1(31.173,-13.28) 34.125,-13.28 47.944,-13.28 48.774,-12.45 52.604,-12.45 53.598,-11.455 65.065,-11.455 68.164,-14.554 72.288,-14.554 73.165,-15.431 J1.38@75.088,-15.431
  Bottom w0.152: v1(22.146,-14.529) 23.396,-13.28 v1(31.173,-13.28)
TCK: CN2.9 J3.47 R5.2 | length 92.5
  Top w0.152: v1(-4.706,-11.049) 11.201,-11.049 13.983,-13.831 J3.47@24.289,-13.831 ; v1(-4.706,8.486) -0.455,8.486 v1(3.612,12.554) ; v1(-3.697,26.224) v1(-3.697,31.939)
  Bottom w0.152: CN2.9@-7.413,36.412 -7.413,34.619 -5.872,33.078 -4.836,33.078 v1(-3.697,31.939) ; v1(-4.706,-11.049) v1(-4.706,8.486) ; v1(-3.697,26.224) -2.504,25.031 1.685,25.031 3.952,22.764 3.952,17.403 R5.2@5.067,16.288 ; v1(3.612,12.554) 3.612,14.669 ; 3.613,14.67 3.613,14.863 5.038,16.288 R5.2@5.067,16.288 ; R5.2@5.145,16.209 R5.2@5.067,16.288
TDI: CN2.5 J3.35 RA2.2 | length 89.1
  Top w0.152: RA2.2@-15.673,30.29 -15.671,30.287 -15.671,31.345 -13.842,33.173 v1(-10.174,33.173) ; v1(18.096,-18.632) J3.35@24.289,-18.631
  Bottom w0.152: CN2.5@-11.413,36.412 -11.413,34.412 v1(-10.174,33.173) -7.519,30.519 -5.787,30.519 -2.056,26.788 3.346,26.788 5.469,24.665 5.469,22.173 9.414,18.228 16.508,18.228 18.096,16.641 v1(18.096,-18.632)
TDO: CN2.13 J3.37 | length 75.1
  Top w0.152: v1(19.924,-17.765) 24.103,-17.765 24.168,-17.831 J3.37@24.289,-17.831
  Bottom w0.152: CN2.13@-3.413,36.412 -3.413,34.334 -2.744,33.665 -2.744,30.433 -1.199,28.889 4.085,28.889 7.085,25.889 7.085,23.606 10.316,20.375 16.666,20.375 19.924,17.116 v1(19.924,-17.765)
TMS: CN2.7 J3.29 RA2.3 | length 92.7
  Top w0.152: RA2.3@-16.562,30.29 -16.562,31.485 -14.284,33.763 -9.33,33.763 v1(-8.777,33.209) ; v1(18.7,-21.032) 21.803,-21.032 ; 21.804,-21.031 J3.29@24.289,-21.031
  Bottom w0.152: CN2.7@-9.413,36.412 -9.413,33.845 v1(-8.777,33.209) -6.701,31.134 -5.533,31.134 -1.892,27.492 3.531,27.492 6.034,24.99 6.034,22.567 9.531,19.07 16.416,19.07 18.7,16.786 v1(18.7,-21.032)
TRSTN: CN2.3 J3.46 R3.2 RA2.1 | length 94.2
  Top w0.152: RA2.1@-14.784,30.29 -14.874,30.38 -14.881,30.38 -14.881,30.956 -13.548,32.289 v1(-10.743,32.289) ; v1(17.25,-15.5) v1(21.928,-15.5) ; v1(27.094,-14.58) J3.46@28.689,-14.58 ; J3.46@28.689,-14.58 28.669,-14.621 28.664,-14.631 28.638,-14.682 28.689,-14.682 28.847,-14.682 28.847,-14.631 28.847,-14.593 28.727,-14.593 J3.46@28.689,-14.631 J3.46@28.689,-14.58
  Top w0.254: v1(2.639,25.733) 5.363,23.008 R3.2@9.255,23.008
  Bottom w0.152: CN2.3@-13.413,36.412 -13.413,34.959 v1(-10.743,32.289) -8.301,29.848 -5.98,29.848 -1.865,25.733 v1(2.639,25.733) 4.776,23.596 4.776,19.105 7.349,16.532 7.349,11.723 17.25,1.823 v1(17.25,-15.5) ; v1(21.928,-15.5) 23.193,-15.5 23.205,-15.512 23.891,-14.827 26.848,-14.827 v1(27.094,-14.58)
TSXM: C30.1 CON1.37 J4.2 J12.13 | length 176
  Top w0.152: J12.13@-24.95,-8.517 -22.595,-8.517 -20.617,-6.539 -20.617,-4.088 -15.94,0.589 1.583,0.589 3.704,2.71 11.453,2.71 13.724,4.981 34.344,4.981 36.29,3.035 J4.2@36.29,1.569 36.29,0.34 37.549,-0.919 v1(39.138,-0.919) ; v1(40.858,-61.876) 49.175,-61.876 54.396,-56.655 CON1.37@54.396,-52.199 54.396,-51.37 55.982,-49.784 60.757,-49.784 62.154,-48.387 62.154,-47.625 62.84,-46.939 65.989,-46.939 C30.1@67.081,-45.847
  Bottom w0.152: v1(39.138,-0.919) 38.677,-1.38 38.677,-33.334 35.722,-36.289 35.722,-45.734 37.441,-47.453 37.441,-58.459 v1(40.858,-61.876)
TSXP: C2.1 CON1.38 J4.4 J12.14 | length 175.1
  Top w0.152: J12.14@-26.95,-8.517 -25.955,-7.522 -23.147,-7.522 -21.328,-5.703 -21.328,-3.677 -15.809,1.841 1.431,1.841 4.199,4.61 11.929,4.61 12.759,5.44 34.449,5.44 37.09,2.799 J4.4@37.09,1.569 37.09,0.34 37.411,0.019 v1(39.14,0.019) ; v1(39.313,-61.962) 39.847,-62.496 49.319,-62.496 54.896,-56.919 CON1.38@54.896,-52.199 54.896,-51.347 56.124,-50.119 61.146,-50.119 C2.1@63.02,-48.245
  Bottom w0.152: v1(39.14,0.019) 38.372,-0.749 38.372,-33.159 35.324,-36.207 35.324,-45.973 36.905,-47.554 36.905,-59.554 v1(39.313,-61.962)
TSYM: C29.1 CON1.39 J4.3 J12.15 | length 185.3
  Top w0.152: v1(-23.085,-3.458) -19.623,0.004 -19.623,0.017 -15.163,4.477 ; -15.163,4.478 1.326,4.478 2.728,5.88 2.728,7.188 3.746,8.207 7.961,8.207 8.471,7.696 36.592,7.696 37.09,7.198 J4.3@37.09,5.969 37.09,4.703 37.551,4.242 v1(38.702,4.242) ; v1(38.031,-62.181) 38.727,-62.877 49.525,-62.877 55.396,-57.006 CON1.39@55.396,-52.199 55.396,-51.31 56.236,-50.47 61.19,-50.47 62.41,-49.251 65.938,-49.251 C29.1@67.081,-48.108
  Bottom w0.152: J12.15@-24.95,-6.517 -26.017,-5.451 -26.017,-3.893 -25.582,-3.458 v1(-23.085,-3.458) ; v1(38.031,-62.181) 36.343,-60.493 36.343,-47.64 34.957,-46.255 34.957,-36.138 38.045,-33.051 38.045,1.012 39.438,2.405 39.438,3.505 v1(38.702,4.242)
TSYP: C1.1 CON1.40 J4.1 J12.16 | length 176
  Top w0.152: J12.16@-26.95,-6.517 -25.913,-5.48 -23.068,-5.48 -22.217,-4.629 -22.217,-3.753 -15.263,3.2 1.304,3.2 4.55,6.447 8.144,6.447 8.621,5.969 J4.1@36.29,5.969 36.29,4.828 v1(37.447,3.67) ; v1(36.964,-62.204) 38.029,-63.269 49.854,-63.269 55.883,-57.24 55.883,-56.486 55.896,-56.473 CON1.40@55.896,-52.199 55.896,-51.337 56.433,-50.8 61.316,-50.8 62.096,-50.019 C1.1@62.927,-50.019
  Bottom w0.152: v1(36.964,-62.204) 35.841,-61.081 35.841,-47.825 34.515,-46.499 34.515,-36.032 37.737,-32.81 37.737,2.18 37.213,2.703 37.213,3.436 v1(37.447,3.67)
TXD0: J1.70 U5.11 | length 20.4
  Top w0.152: v1(73.258,-38.732) 76.201,-35.789 77.307,-35.789 v1(78.348,-34.747) ; J1.70@75.088,-28.231 76.137,-28.231 76.378,-28.472 76.378,-31.946 ; v1(76.377,-33.005) 76.377,-31.946
  Bottom w0.152: U5.11@69.832,-40.767 69.832,-39.416 70.517,-38.732 v1(73.258,-38.732) ; v1(76.377,-33.005) 77.155,-33.783 77.384,-33.783 v1(78.348,-34.747)
TXD1: J1.69 J13.11 | length 149.9
  Top w0.152: J13.11@-24.95,19.205 -16.855,19.205 -16.376,18.725 27.218,18.725 34.762,11.182 61.237,11.182 65.144,7.275 71.338,7.275 76.175,2.438 78.943,2.438 81.941,-0.559 81.941,-3.353 83.127,-4.539 v1(84.628,-4.539) ; J1.69@79.488,-28.231 v1(84.628,-28.231)
  Bottom w0.152: v1(84.628,-28.231) v1(84.628,-4.539)
TXD2: J1.65 J13.16 | length 156.2
  Top w0.152: J13.16@-26.95,23.205 -25.884,24.27 -17.542,24.27 -14.511,21.239 2.308,21.239 3.471,20.076 27.856,20.076 35.448,12.484 62.397,12.484 66.461,8.419 71.972,8.419 76.378,4.013 79.223,4.013 v1(85.554,-2.319) ; J1.65@79.488,-26.631 v1(86.86,-26.631)
  Bottom w0.152: v1(85.554,-2.319) 86.86,-3.624 v1(86.86,-26.631)
TXD3: J1.67 J13.18 | length 159.3
  Top w0.152: J13.18@-26.95,25.205 -25.896,26.259 -17.961,26.259 -14.009,22.306 3.056,22.306 4.074,21.288 28.796,21.288 37.148,12.936 62.817,12.936 66.901,8.852 72.073,8.852 76.403,4.521 79.324,4.521 85.242,-1.397 85.7,-1.397 v1(86.766,-2.464) ; J1.67@79.488,-27.431 81.124,-27.431 ; 81.124,-27.431 v1(87.505,-27.431)
  Bottom w0.152: v1(86.766,-2.464) 87.505,-3.202 v1(87.505,-27.431)
TXD+: J10.3 R46.1 U7.7 | length 60.5
  Bottom w0.152: U7.7@50.464,-21.495 50.464,-20.845 50.735,-20.575 55.195,-20.575 56.566,-21.946 56.566,-24.206 64.249,-31.89 70.842,-31.89 77.265,-38.312 78.226,-39.274 90.287,-39.274 R46.1@91.354,-38.207 ; R46.1@91.191,-38.207 R46.1@91.354,-38.207 ; J10.3@98.1,-38.407 97.14,-37.447 97.14,-36.706 96.322,-35.888 93.794,-35.888 91.475,-38.207 R46.1@91.354,-38.207
TXD-: J10.6 R45.1 U7.8 | length 57.7
  Bottom w0.152: U7.8@49.964,-21.495 49.964,-20.874 50.595,-20.244 55.651,-20.244 57.048,-21.641 57.048,-23.978 64.656,-31.585 70.969,-31.585 78.353,-38.969 82.949,-38.969 84.76,-37.159 84.792,-37.159 85.257,-36.694 89.678,-36.694 89.678,-36.301 R45.1@89.66,-36.284 91.347,-34.597 J10.6@95.56,-34.597
USBDN: J2.18 R87.2 | length 90.3
  Top w0.152: R87.2@-13.654,-47.571 -12.22,-46.137 -8.244,-46.137 -3.177,-51.204 v1(-2.217,-51.204) ; v1(7.62,-51.204) 9.948,-51.204 13.148,-48.004 58.365,-48.004 v1(59.436,-46.933) ; v1(61.089,-36.526) J2.18@61.089,-34.831
  Bottom w0.152: v1(-2.217,-51.204) v1(7.62,-51.204) ; v1(59.436,-46.933) 60.012,-46.358 60.012,-37.604 v1(61.089,-36.526)
USBDP: J2.16 R88.2 | length 89.3
  Top w0.152: R88.2@-11.117,-47.57 -11.117,-47.532 -10.027,-46.443 -8.371,-46.443 -2.879,-51.935 v1(-1.156,-51.935) ; v1(8.369,-51.935) 9.649,-51.935 13.254,-48.33 59.322,-48.33 v1(59.988,-47.665) ; v1(61.887,-36.874) 61.889,-36.874 J2.16@61.889,-34.831
  Bottom w0.152: v1(-1.156,-51.935) v1(8.369,-51.935) ; v1(59.988,-47.665) 60.572,-47.08 60.572,-38.189 v1(61.887,-36.874)